# Altium PCB Peter's Game Boy.pcbdoc
Units mil, origin at the board's own origin, x right, y up, seen from the top; angles counter-clockwise.
Board outline 4824.41 x 1871.65 mil, 2 copper layers (Top Layer, Bottom Layer); 28 components, 24 nets, 141 pads, 22 vias.
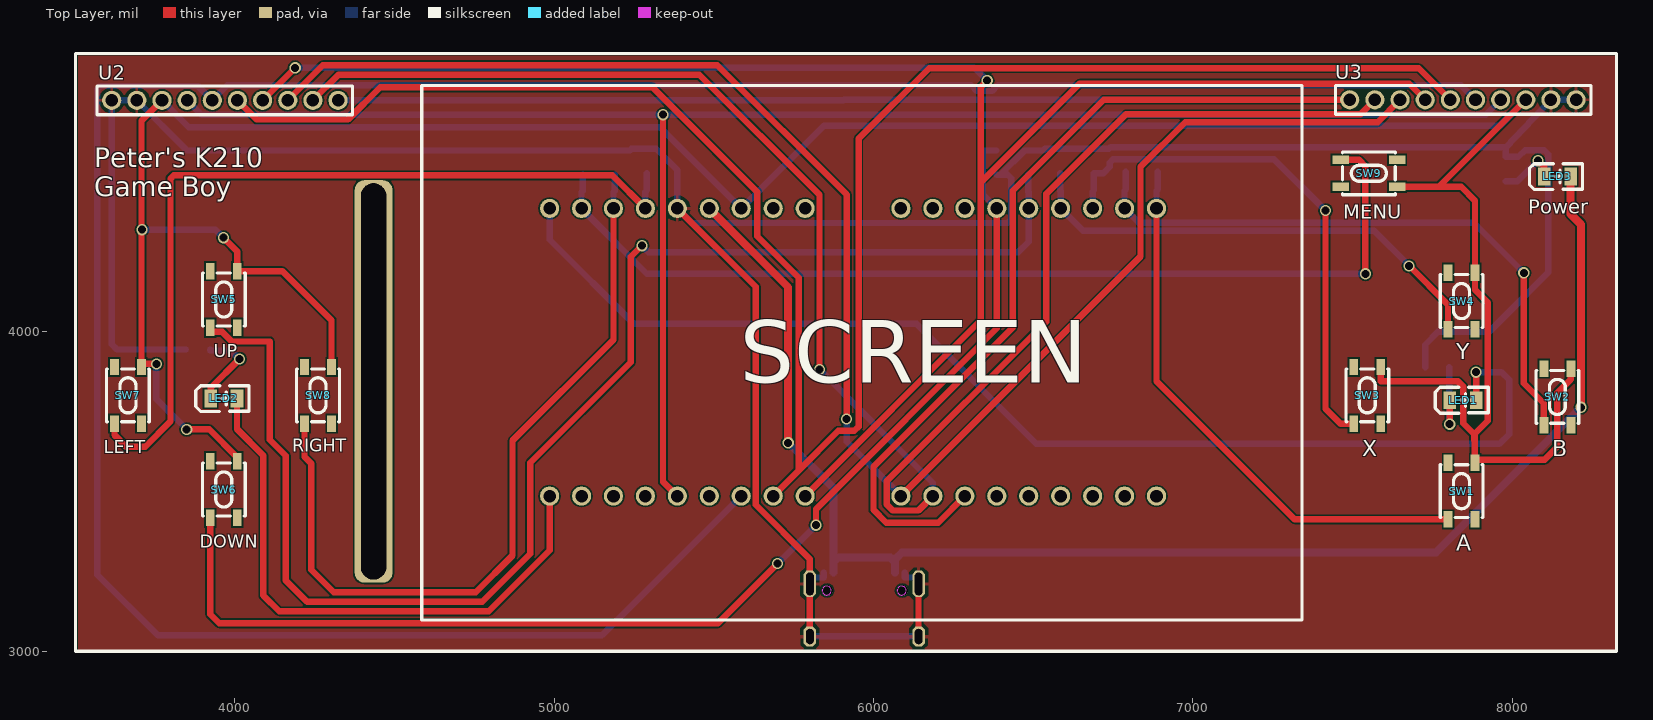
[diagram p0: Top Layer view]
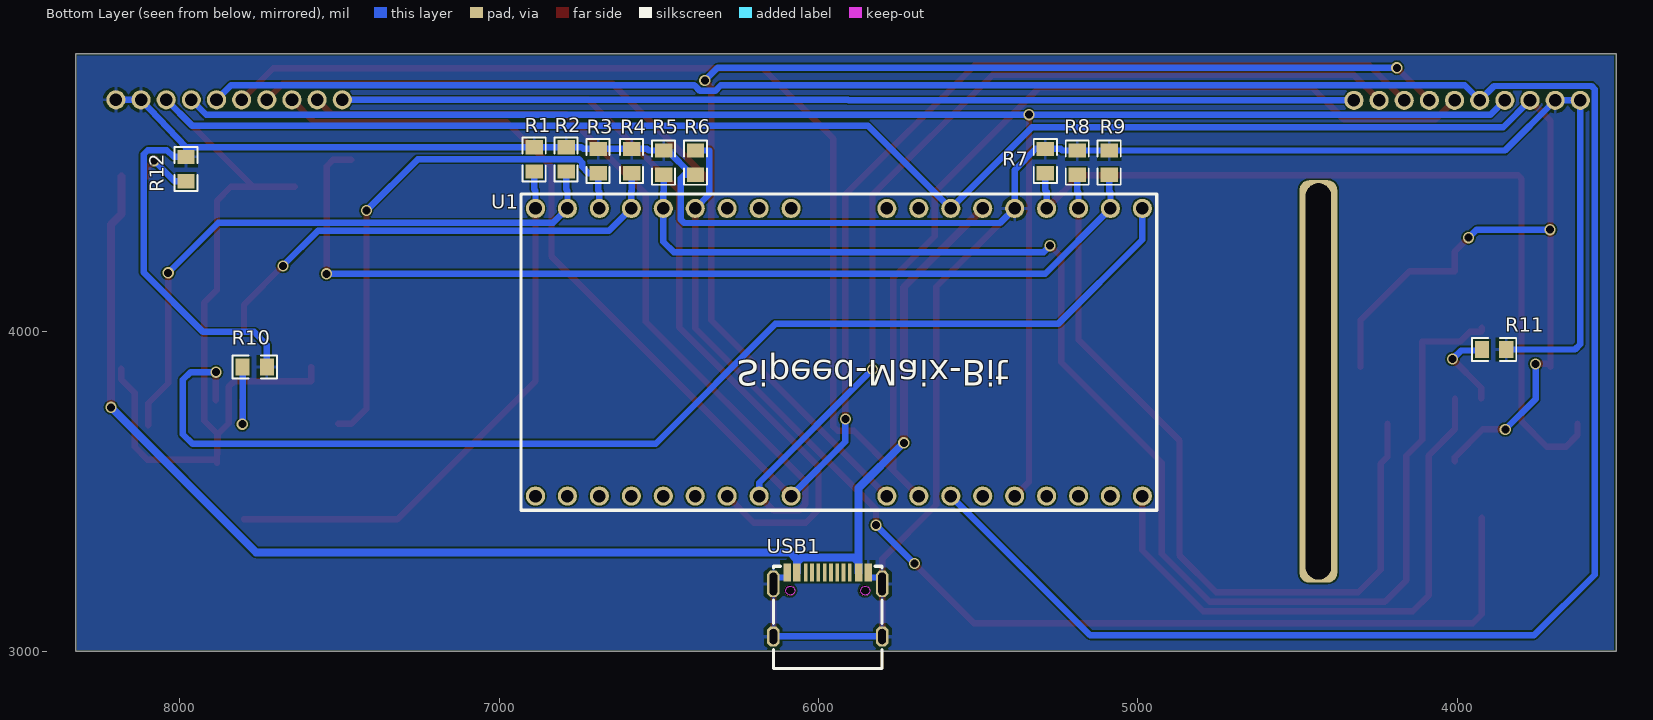
[diagram p1: Bottom Layer view, seen from below]

## Layer stack, top to bottom
Top Solder: solder mask 0.4, Solder Resist, Dk 3.5
Top Layer: signal copper 1.4
Dielectric 1: dielectric 12.6, FR-4, Dk 4.8
Bottom Layer: signal copper 1.4
Bottom Solder: solder mask 0.4, Solder Resist, Dk 3.5

## Board outline
3501.75,3000 3501.75,4871.65 8326.16,4871.65 8326.16,3000

## Design rules (kind name [scope] priority, off if disabled: settings)
Clearance [All] p1: gap=5 ignorepadtopadclearanceinfootprint=FALSE
MinimumSolderMaskSliver [All] p1: minsoldermaskwidth=2
PolygonConnect [All] p1: connectstyle=Relief reliefconductorwidth=10 reliefentries=4 polygonreliefangle="90 Angle" airgapwidth=10
RoutingVias [All] p1: holewidth=25 width=35 viastyle="Through Hole" minholewidth=25 minwidth=35 maxholewidth=25 maxwidth=35
SilkToSilkClearance [All] p1: silktosilkclearance=0
SilkToSolderMaskClearance [IsPad] p1: minsilkscreentomaskgap=1 clearancetoexposedcopper=TRUE
SolderMaskExpansion [All] p1: expansion=4
Width "Power 5" [InNet('5VCC')] p1: maxlimit=30 minlimit=20 preferedwidth=25
Width [All] p2: maxlimit=25 minlimit=15 preferedwidth=20
27 further rules are at their usual default settings.

## Components (designator, comment, footprint, x,y, rotation, side; value= is the part's Value field where it differs from the comment)
LED1 "" LED0805-R-RD 7846,3786.65 r0 top
LED2 "" LED0805-R-RD 3966,3791.65 r0 top
LED3 "Power" LED0805-R-RD 8141,4486.65 r0 top
R1 "" R0805 6890,4540 r270 bottom
R2 "" R0805 6790,4540 r270 bottom
R3 "" R0805 6690,4535 r270 bottom
R4 "" R0805 6585,4535 r270 bottom
R5 "" R0805 6485,4530 r270 bottom
R6 "" R0805 6385,4530 r90 bottom
R7 "" R0805 5290,4535 r270 bottom
R8 "" R0805 5190,4530 r270 bottom
R9 "" R0805 5090,4530 r270 bottom
R10 "" R0805 7765,3890 r180 bottom
R11 "" R0805 3885,3945 r180 bottom
R12 "" R0805 7980,4510 r90 bottom
SW1 "A" SW-SMD_4P-L4.2-W3.3-P2.15-LS5.1 7841,3501.65 r90 top
SW2 "B" SW-SMD_4P-L4.2-W3.3-P2.15-LS5.1 8141,3796.65 r90 top
SW3 "X" SW-SMD_4P-L4.2-W3.3-P2.15-LS5.1 7546,3801.65 r90 top
SW4 "Y" SW-SMD_4P-L4.2-W3.3-P2.15-LS5.1 7841,4096.65 r90 top
SW5 "UP" SW-SMD_4P-L4.2-W3.3-P2.15-LS5.1 3966,4101.65 r90 top
SW6 "DOWN" SW-SMD_4P-L4.2-W3.3-P2.15-LS5.1 3966,3506.65 r90 top
SW7 "LEFT" SW-SMD_4P-L4.2-W3.3-P2.15-LS5.1 3666,3801.65 r90 top
SW8 "RIGHT" SW-SMD_4P-L4.2-W3.3-P2.15-LS5.1 4261,3801.65 r90 top
SW9 "MENU" SW-SMD_4P-L4.2-W3.3-P2.15-LS5.1 7551,4496.65 r0 top
U1 "" Sipeed-Maix-Bit 6946,4436.65 r180 bottom
U2 "" Sipeed-Maix-Bit-out-pin 4388.74,4680 r180 top
U3 "" Sipeed-Maix-Bit-out-pin 7426,4771.65 r0 top
USB1 "" USB-C-SMD_TYPEC-304-BCP16 5971,3146.65 r180 bottom

## Footprints (in the part's own frame and the unit in brackets; to place one, negate y for a bottom-side part, rotate by r counter-clockwise, add the part's x,y. Pads: shape width x height; smd on the part's side, far side on the other; paste and mask are expansions set on the pad)
LED0805-R-RD [mil]
  rect 39.4x55.1 smd mask+2: 1(41.4,0) 2(-41.3,0)
  silkscreen extent -88,-41 78,40
R0805 [mil]
  rect 44.6x54.2 smd mask+2: 1(-38,0) 2(38,0)
  silkscreen extent -69,-36 69,36
Sipeed-Maix-Bit [mil]
  round 60 hole 39.37: 1(60,-950.51) 2(160,-950.51) 3(260,-950.51) 4(360,-950.51) 5(460,-950.51) 6(560,-950.51) 7(660,-950.51) 8(760,-950.51) 9(860,-950.51) 10(1160,-950.51) 11(1260,-950.51) 12(1360,-950.51) 13(1460,-950.51) 14(1560,-950.51) 15(1660,-950.51) 16(1760,-950.51) 17(1860,-950.51) 18(1960,-950.51) 19(60,-50) 20(160,-50) 21(260,-50) 22(360,-50) 23(460,-50) 24(560,-50) 25(660,-50) 26(760,-50) 27(860,-50) 28(1160,-50) 29(1260,-50) 30(1360,-50) 31(1460,-50) 32(1560,-50) 33(1660,-50) 34(1760,-50) 35(1860,-50) 36(1960,-50)
  silkscreen extent 15,-995 2005,-5
Sipeed-Maix-Bit-out-pin [mil]
  round 60 hole 39.37: 1(65,-45) 2(143.74,-45) 3(222.48,-45) 4(301.22,-45) 5(379.96,-45) 6(458.7,-45) 7(537.44,-45) 8(616.18,-45) 9(694.92,-45) 10(773.66,-45)
  silkscreen extent 20,-90 820,0
SW-SMD_4P-L4.2-W3.3-P2.15-LS5.1 [mil]
  rect 51.2x27.6 smd mask+2: 1(-88.6,42.3) 2(88.6,42.3) 3(-88.6,-42.3) 4(88.6,-42.3)
  silkscreen extent -83,-67 83,67
USB-C-SMD_TYPEC-304-BCP16 [mil]
  oct 39.4x82.7 hole 23.6 slot 70.9 at 90 deg mask+2: 13(-170.1,64.3) 14(170.1,64.3)
  oct 39.4x63 hole 23.6 slot 47.2 at 90 deg mask+2: 15(-170.1,-100.3) 16(170.1,-100.3)
  rect 23.6x57.1 smd mask+2: A1B12(-127,100.3) A4B9(-96.5,100.3) B1A12(126.8,100.3) B4A9(96.5,100.3)
  rect 11.8x57.1 smd mask+2: A5(-49.2,100.3) A6(-9.8,100.3) A7(9.8,100.3) A8(49.2,100.3) B5(68.9,100.3) B6(29.5,100.3) B7(-29.5,100.3) B8(-68.9,100.3)
  Keep-Out Layer board cut-out: 131.1,43.4 131.1,43.4 129.73,37.41 125.9,32.61 120.37,29.95 114.23,29.95 108.7,32.61 104.87,37.41 103.5,43.4 103.5,43.4 104.87,49.39 108.7,54.19 114.23,56.85 120.37,56.85 125.9,54.19 129.73,49.39 131.1,43.4
  Keep-Out Layer board cut-out: -103.5,43.4 -103.5,43.4 -104.87,37.41 -108.7,32.61 -114.23,29.95 -120.37,29.95 -125.9,32.61 -129.73,37.41 -131.1,43.4 -131.1,43.4 -129.73,49.39 -125.9,54.19 -120.37,56.85 -114.23,56.85 -108.7,54.19 -104.87,49.39 -103.5,43.4
  silkscreen extent -170,-200 170,120

## Free pads (board coordinates)
  rrect50% 118.11x1259.84 hole 78.74 slot 1240.16 at 90 deg: 1(4435,3845)
  round 35 hole 35: 2(5855,3190) 2(6090,3190)

## Via types
v1: diameter 35, hole 25, Top Layer to Bottom Layer, tented both sides, 22 vias

## Nets (pads, with @x,y where several pads share a name; then routed paths per layer and width w, separated by ;. In a path a pad name is that pad's centre, name@x,y a point inside that pad or via, vN(x,y) a via of type N, cw(c..) or ccw(c..) an arc to the next point about the centre after c; other vN are vias at no path point)
3.3VCC: SW1.4 SW2.4 SW3.4 SW4.4 SW5.4 SW6.4 SW7.4 SW8.4 SW9.4 U1.30 U2.8 U3.8 | length 9406.5
  Top Layer w20: SW7.4 SW7.4@3708.3,3896.2 ; v1(3755,3900) 3712.1,3900 SW7.4@3708.3,3896.2 ; U2.8 3708.3,4660.74 SW7.4@3708.3,3896.2 ; v1(3850,3695) 3920.35,3695 4008.3,3607.05 SW6.4 ; v1(3965,4295) 4008.3,4251.7 SW5.4 4149.75,4190.25 4303.3,4036.7 SW8.4 ; SW3.4 7588.3,3845 7830,3845 7846,3829 7846,3714.3 7880.8,3679.5 ; SW9.4 7769.88,4454.35 ; U3.8 7769.88,4454.35 ; SW2.4 8183.3,3851.3 8141,3809 8141,3640 8101,3600 SW1.4@7883.3,3600 ; 7769.88,4454.35 7840,4454.35 7883.3,4411.05 SW4.4 7883.3,4131.7 7923,4092 7923,3721.7 7880.8,3679.5 ; 7880.8,3679.5 7883.3,3677 SW1.4@7883.3,3600 ; 7880.8,3679.5 SW1.4 SW1.4@7883.3,3600
  Bottom Layer w20: v1(3710,4320) 3940,4320 v1(3965,4295) ; v1(3755,3900) 3755,3790 v1(3850,3695) ; U2.8 3856.56,4641 5331.65,4641 U1.30 5845.35,4646 7961.53,4646 U3.8
5VCC: LED3.1 U1.31 USB1.A4B9 USB1.B4A9 | length 4626.8
  Top Layer w25: U1.31 5733,4139.65 v1(5733,3653) ; LED3.1 8182.4,4369 8215,4336.4 v1(8215,3764)
  Bottom Layer w25: v1(5733,3653) 5874.5,3511.5 5874.5,3280 ; USB1.B4A9 5874.5,3280 ; USB1.A4B9 6067.5,3280 ; v1(8215,3764) 7761,3310 6090,3310 6067.5,3287.5 6067.5,3280 ; 5874.5,3280 5888.5,3294 6053.5,3294 6067.5,3280
$1N5516: LED1.2 R10.1 | length 255.4
  Top Layer w20: v1(7804,3711) 7804,3785.95 LED1.2
  Bottom Layer w20: R10.1 7803,3712 v1(7804,3711)
$1N5531: LED2.2 R11.1 | length 266.9
  Top Layer w20: LED2.2 3924.7,3824.7 v1(4015,3915)
  Bottom Layer w20: R11.1 3923,3942 3988,3942 v1(4015,3915)
$1N8451: LED3.2 R12.1 | length 184
  Top Layer w20: v1(8080,4536) 8099.7,4516.3 LED3.2
  Bottom Layer w20: R12.1 8016,4472 v1(8080,4536)
BOTTOM-A: R1.2 SW1.1 U1.19 | length 1749.8
  Top Layer w20: U1.19 6886,3846 7319,3413 7798.7,3413 SW1.1
  Bottom Layer w20: U1.19 6886,4442 6890,4446 R1.2
BOTTOM-B: R2.2 SW2.1 U1.20 | length 1953.4
  Top Layer w20: v1(8036,4185) 8036,3839.7 8098.7,3777 SW2.1
  Bottom Layer w20: R2.2 6790,4446 6786,4442 U1.20 6831,4341.65 7879.35,4341.65 v1(8036,4185)
BOTTOM-DOWN: R6.2 SW6.1 U1.24 | length 3805.4
  Top Layer w20: SW6.1 3923.7,3116.3 3951.72,3088.28 5513.28,3088.28 v1(5700,3275) ; v1(5820,3395) 5820,3445 6386,4011 U1.24
  Bottom Layer w20: v1(5700,3275) v1(5820,3395) ; R6.2 6342,4568 6342,4430.65 U1.24
BOTTOM-LEFT: R7.2 SW7.1 U1.33 | length 2664.8
  Top Layer w20: SW7.1 3623.7,3677.3 3660,3641 3720,3641 3799,3720 3799,4480 3809,4490 5182.65,4490 U1.33
  Bottom Layer w20: U1.33 5286,4439 5290,4443 R7.2
BOTTOM-MID: R9.2 SW9.1 U1.35 | length 3068.6
  Top Layer w20: SW9.1 7520,4538.95 7540,4518.95 v1(7540,4182)
  Bottom Layer w20: R9.2 5090,4441 5086,4437 U1.35 5290.65,4182 v1(7540,4182)
BOTTOM-RIGHT: R8.2 SW8.1 U1.34 | length 2498.1
  Top Layer w20: SW8.1 4218.7,3609.35 4240,3588.05 4240,3255 4310,3185 4755,3185 4870,3300 4870,3660 5186,3976 U1.34
  Bottom Layer w20: U1.34 5186,4437 5190,4441 R8.2
BOTTOM-UP: R5.2 SW5.1 U1.23 | length 4385.8
  Top Layer w20: SW5.1 3923.7,4003.8 3927.5,4000 3960.74,4000 3990.74,3970 4110,3970 4110,3662.5 4160,3612.5 4160,3221.72 4226.72,3155 4775,3155 4925,3305 4925,3590 5240,3905 5240,4235 v1(5275,4270)
  Bottom Layer w20: v1(5275,4270) 5295,4250 6453.28,4250 6486,4282.72 U1.23 6486,4438 6485,4439 R5.2
BOTTOM-X: R3.2 SW3.1 U1.21 | length 1656.9
  Top Layer w20: v1(7415,4380) 7415,3760 7462,3713 7503.7,3713 SW3.1
  Bottom Layer w20: U1.21 6686,4439 6690,4443 R3.2 6720,4497 6740,4517 6740,4530 6750,4540 7255,4540 v1(7415,4380)
BOTTOM-Y: R4.2 SW4.1 U1.22 | length 1525.4
  Top Layer w20: v1(7677,4206.7) 7798.7,4085 SW4.1
  Bottom Layer w20: R4.2 6585,4442 6586,4441 U1.22 6656,4316.65 7567.05,4316.65 v1(7677,4206.7)
GND: R1.1 R2.1 R3.1 R4.1 R5.1 R6.1 R7.1 R8.1 R9.1 R10.2 R11.2 R12.2 U1.32 U2.9 U2.10 U3.9 U3.10 USB1.13 USB1.14 USB1.15 USB1.16 USB1.A1B12 USB1.B1A12 | length 9411.4
  Top Layer w20: U1.32 5631,4141.65 5631,3459 5800.9,3289.1 USB1.14 USB1.16 ; USB1.15 USB1.13
  Bottom Layer w20: R11.2 3631.72,3945 3615.08,3961.64 U2.10 U2.9 3850.82,4568 R9.1 R8.1 5237,4568 5242,4573 R7.1 5320,4573 5386,4507 U1.32 5431.65,4341 6420,4341 6431,4352 6431,4481 6420,4492 R6.1@6397,4492 ; USB1.16 5800.9,3047 6141.1,3047 USB1.15 ; USB1.14 5800.9,3231 5844.2,3231 USB1.B1A12 ; USB1.A1B12 6098,3231 6141.1,3231 USB1.13 ; R6.1 R6.1@6397,4492 ; R10.2 7727,3960 7767,4000 7927,4000 8113,4186 8113,4556 8100,4569 8040,4569 8019,4548 R12.2 7980,4578 ; U3.10 U3.9 7980,4578 ; R6.1@6397,4492 6473,4568 R5.1 6532,4568 6537,4573 R4.1 R3.1 6737,4573 6742,4578 R2.1 R1.1 7980,4578
IO6: U1.7 U2.1 U3.1 | length 5857.5
  Top Layer w20: U1.7 6202.86,3403 6040,3403 6000,3443 6000,3578 6436,4014 6436,4442 6720.65,4726.65 U3.1
  Bottom Layer w20: U2.1 5906,4725 5907.65,4726.65 U3.1
IO7: U1.8 U2.2 U3.2 | length 5366.3
  Top Layer w20: U2.2 4325,4805 5455,4805 5831,4429 v1(5831,3882.64) ; U1.8 6140.86,3441 6060,3441 6041,3460 6041,3532 6541,4032 6541,4432 6790.65,4681.65 7524.74,4681.65 U3.2
  Bottom Layer w20: v1(5831,3882.64) 6186,3527.64 U1.8
IO8: U1.9 U2.3 U3.3 | length 5218.2
  Top Layer w20: U2.3 4276.26,4835 5511,4835 5916,4430 v1(5916,3727) ; U1.9 6836,4236.14 6836,4517 6975.65,4656.65 7578.48,4656.65 U3.3
  Bottom Layer w20: v1(5916,3727) 5916,3656.14 U1.9
IO9: U1.10 U2.4 U3.4 | length 5404.3
  Top Layer w20: U2.4 v1(4189.52,4827) ; U1.10 6336,4036.14 6336,4468 ; v1(6356,4787) 6336,4767 6336,4468 ; U3.4 7676.87,4777 6645,4777 6336,4468
  Bottom Layer w20: v1(4189.52,4827) 6316,4827 v1(6356,4787)
IO10: U1.11 U2.5 U3.5 | length 5999.7
  Top Layer w20: U2.5 4068.78,4665 4355,4665 4456,4766 5308,4766 5636,4438 5636,4300 5766,4170 5766,3566.14 ; U1.11 5766,3566.14 ; U3.5 7706.61,4826 6174.35,4826 5953.3,4604.95 5953.3,3703.38 5940,3690.08 5889.93,3690.08 5766,3566.14
IO15: U1.12 U2.6 U3.6 | length 8185.6
  Bottom Layer w20: U1.12 5149.86,3050 3760,3050 3570,3240 3570,4760 3580,4770 3885.04,4770 U2.6 3977.04,4772 6306,4772 6323.5,4754.5 6371,4754.5 6388.5,4772 7839.36,4772 U3.6
IO17: U1.14 U2.7 U3.7 | length 5362.6
  Top Layer w20: v1(5341,4680) 5341,3531.14 U1.14
  Bottom Layer w20: U2.7 3896.3,4680 v1(5341,4680) 7916.79,4680 U3.7
LIGHT-A: LED1.1 U1.36 | length 3751.8
  Top Layer w20: v1@7885,3875 v1(7886.2,3873.8) 7887.4,3872.6 LED1.1
  Bottom Layer w20: U1.36 4986,4289 5250,4025 6135,4025 6510,3650 7960,3650 7990,3680 7990,3850 7966.2,3873.8 v1(7886.2,3873.8)
LIGHT-B: LED2.1 U1.18 | length 1816.8
  Top Layer w20: LED2.1 4007.4,3695.85 4090,3613.25 4090,3175 4140,3125 4795,3125 4986,3316 U1.18
pads on no net: SW1.2 SW1.3 SW2.2 SW2.3 SW3.2 SW3.3 SW4.2 SW4.3 SW5.2 SW5.3 SW6.2 SW6.3 SW7.2 SW7.3 SW8.2 SW8.3 SW9.2 SW9.3 U1.1 U1.2 U1.3 U1.4 U1.5 U1.6 U1.13 U1.15 U1.16 U1.17 U1.25 U1.26 U1.27 U1.28 U1.29 USB1.A5 USB1.A6 USB1.A7 USB1.A8 USB1.B5 USB1.B6 USB1.B7 USB1.B8
copper on no net: | length 1.8
  Bottom Layer w1: 6087.05,3175 6088.3,3176.25

## Polygon pours and split planes (outlines as drawn)
GND on Top Layer "Top Layer-GND" (solid, pour order 0): 3510,4865 8320,4865 8320,3005 3510,3005
GND on Bottom Layer "Bottom Layer-GND" (solid, pour order 2): 3510,4865 8320,4865 8320,3005 3510,3005

## Silkscreen, mask and mechanical layers (free items; w line width, h text height)
Top Overlay:
  lines w10: 3501.75,3000 8326.16,3000 8326.16,4871.65 3501.75,4871.65 3501.75,3000 ; 4586,3098.43 7341.91,3098.43 7341.91,4771.65 4586,4771.65 4586,3098.43
  text "Peter's K210 / Game Boy" at 3560,4425 h60
  text "SCREEN" at 5581,3841.65 h196.85

## Text inside footprints (layer, text, board x,y; h text height)
U1: Bottom Overlay "Sipeed-Maix-Bit" at 6256,3911.65 h80 r180